# Altium PCB SingleLayer.PcbDoc
Units mm, origin at the board's own origin, x right, y up, seen from the top; angles counter-clockwise.
Board outline 33.78 x 22.48 mm, 2 copper layers (Top Layer, Bottom Layer); 13 components, 11 nets, 45 pads, 12 vias.
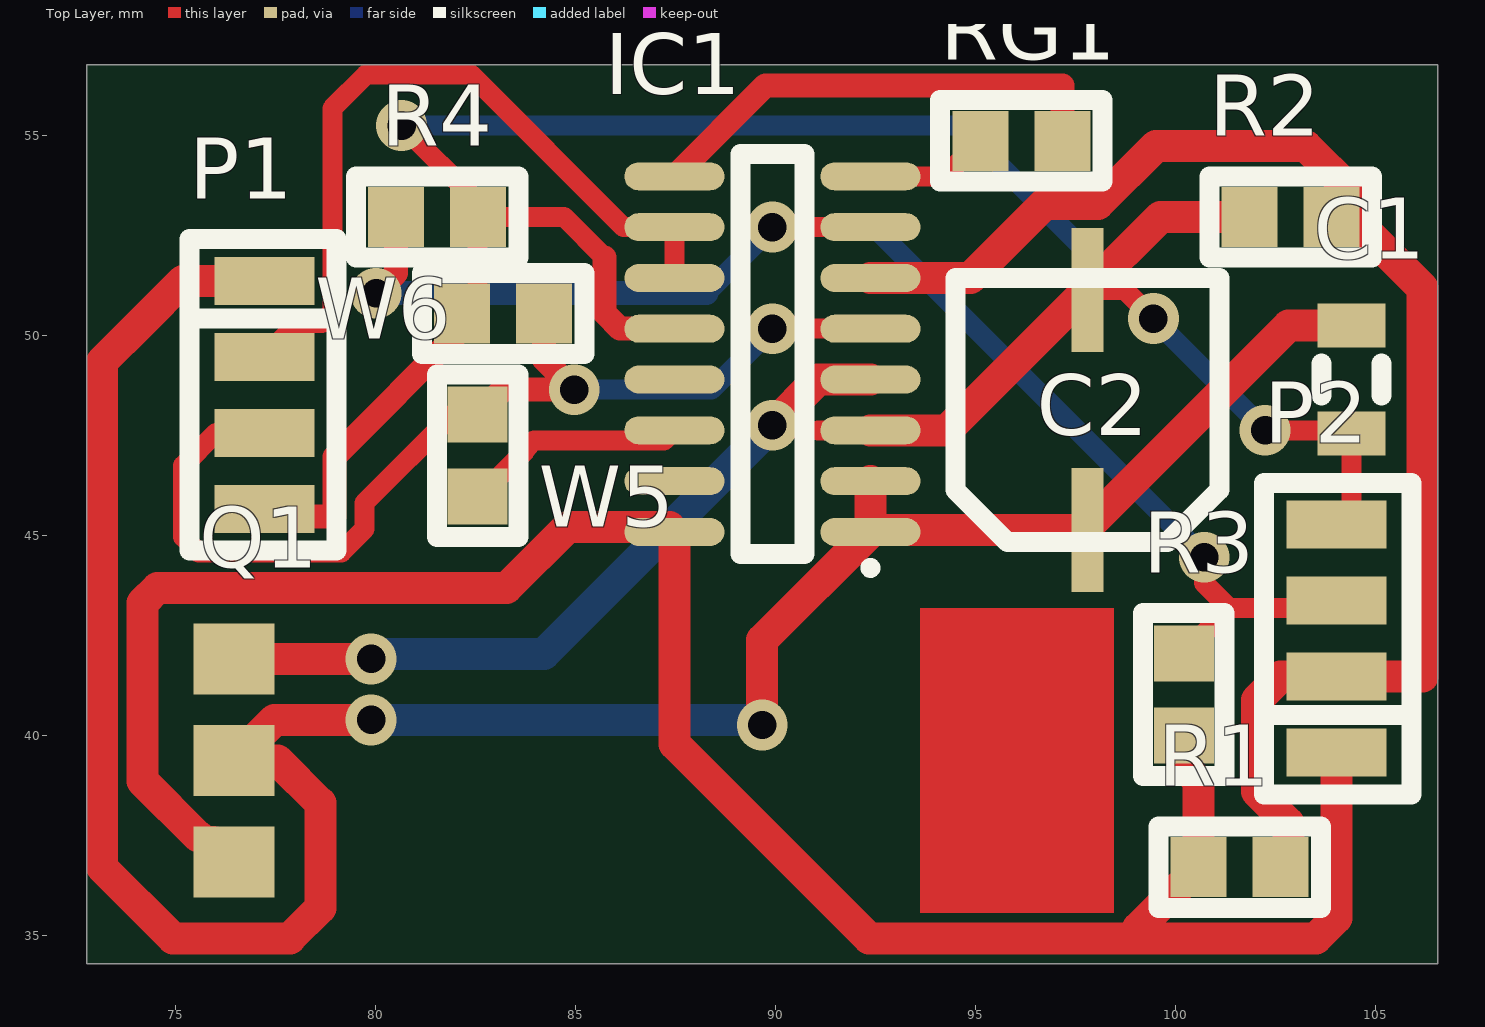
[diagram p0: Top Layer view]
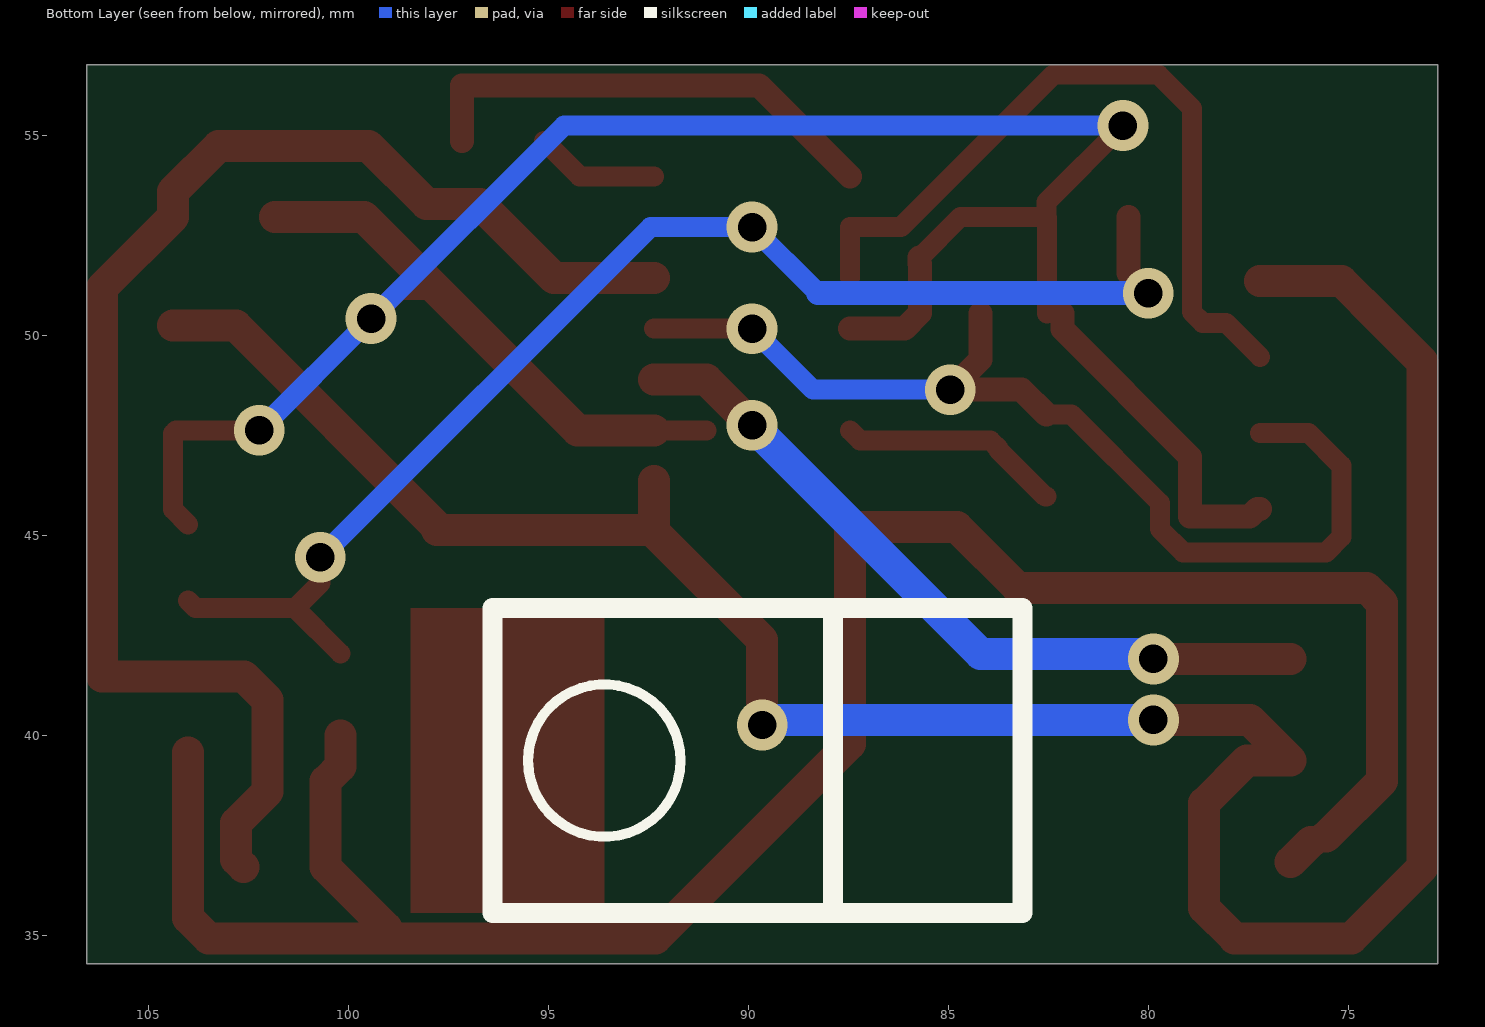
[diagram p1: Bottom Layer view, seen from below]

## Layer stack, top to bottom
Top Solder: solder mask 0.0102, Solder Resist, Dk 3.5
Top Layer: signal copper 0.0356
Dielectric 1: dielectric 0.32, FR-4, Dk 4.8
Bottom Layer: signal copper 0.0356
Bottom Solder: solder mask 0.0102, Solder Resist, Dk 3.5

## Board outline
72.771,34.29 106.553,34.29 106.553,56.769 72.771,56.769

## Design rules (kind name [scope] priority, off if disabled: settings)
Clearance [All] p1: gap=0.2
PolygonConnect [All] p1: connectstyle=Relief reliefconductorwidth=0.254 reliefentries=4 polygonreliefangle="90 Angle" airgapwidth=0.254
RoutingVias [All] p1: holewidth=0.711 width=1.27 viastyle="Through Hole" minholewidth=0.711 minwidth=1.27 maxholewidth=0.711 maxwidth=1.27
SolderMaskExpansion [All] p1: expansion=0.102
Width [All] p1: maxlimit=0.8 minlimit=0.254 preferedwidth=0.6
30 further rules are at their usual default settings.

## Components (designator, comment, footprint, x,y, rotation, side; value= is the part's Value field where it differs from the comment)
C1 "100n" C1206 104.394,48.895 r270 top
C2 "10u" "SMD CAPACITOR 220UF 16V" 97.79,48.133 r180 top
IC1 "INA125U" SOIC16_M 89.916,49.53 r180 top
P1 "Output/Power" "SMD 4Wire" 77.216,48.514 r180 top
P2 "Input/Reference" "SMD 4Wire" 104.013,42.418 r0 top
Q1 "NPN" TO220_SMD_BENT 76.581,36.83 r0 top
R1 "Res1" R0805 101.6,36.703 r180 top
R2 "Res1" R0805 102.87,52.959 r0 top
R3 "Res1" R0805 100.203,41.021 r270 top
R4 "Res1" R0805 81.534,52.959 r180 top
RG1 "Res1" R0805 96.139,54.864 r180 top
W5 "VOUT-" R0805 82.55,46.99 r270 top
W6 "GND" R0805 83.185,50.546 r180 top

## Footprints (in the part's own frame and the unit in brackets; to place one, negate y for a bottom-side part, rotate by r counter-clockwise, add the part's x,y. Pads: shape width x height; smd on the part's side, far side on the other; paste and mask are expansions set on the pad)
C1206 [mm] "Chip Capacitor, Body 3.2x1.6mm, IPC High Density"
  rect 1.1x1.7 smd: 1(-1.35,0) 2(1.35,0)
  silkscreen extent -0.4,-0.75 0.4,0.75, body extent -1.7,-0.9 1.7,0.9, height 1.3
R0805 [mm]
  rect 1.4x1.5 smd: 1(-1.025,0) 2(1.025,0)
  silkscreen extent -2.03,-1.02 2.03,1.02, body extent -1.4,-0.76 1.4,0.76, height 1
"SMD 4Wire" [mm]
  rect 2.5x1.2 smd: 1(0,-2.85) 2(0,-0.95) 3(0,0.95) 4(0,2.85)
  silkscreen extent -1.8,-3.89 1.88,3.89
"SMD CAPACITOR 220UF 16V" [mm]
  rect 0.8x3.1 smd: 1(0,3) 2(0,-3)
  silkscreen extent -3.3,-3.3 3.3,3.3, body extent -3,-3 3,3, height 5
SOIC16_M [mm] "SOIC, 16-Leads, Body 9.9x3.9mm, Pitch 1.27mm, IPC Low Density"
  oval 2.5x0.7 smd: 1(-2.45,4.445) 2(-2.45,3.175) 3(-2.45,1.905) 4(-2.45,0.635) 5(-2.45,-0.635) 6(-2.45,-1.905) 7(-2.45,-3.175) 8(-2.45,-4.445) 9(2.45,-4.445) 10(2.45,-3.175) 11(2.45,-1.905) 12(2.45,-0.635) 13(2.45,0.635) 14(2.45,1.905) 15(2.45,3.175) 16(2.45,4.445)
  silkscreen extent -2.58,-5 0.8,5.47, body extent -2,-5 2,5, height 1.91
TO220_SMD_BENT [mil]
  rect 80x70 smd: 1(-5,0) 2(-5,100) 3(-5,200)
  Top Layer region: 670.43,-50 861.14,-50 861.14,250 670.43,250
  body extent 259,-50 778,250, height 177

## Part data
C1 C2: library part CAP_1, "Capacitor"
IC1: "<b>Instrumentation Amplifier</b><p> / with Precision Voltage Reference"
P1 P2: library part "Header 4", "Header, 4-Pin"
Q1: "NPN Bipolar Transistor"
R1 R2 R3 R4 RG1: "Resistor"
W5 W6: library part Jumper, "Jumper Wire"

## Via types
v1: diameter 1.27, hole 0.711, Top Layer to Bottom Layer, 12 vias

## Nets (pads, with @x,y where several pads share a name; then routed paths per layer and width w, separated by ;. In a path a pad name is that pad's centre, name@x,y a point inside that pad or via, vN(x,y) a via of type N, cw(c..) or ccw(c..) an arc to the next point about the centre after c; other vN are vias at no path point)
2_5V: IC1.14 W5.2 | length 5.6
  Top Layer w0.5: W5.2 82.586,45.965 83.75,47.129 83.75,47.165 83.956,47.371 87.212,47.371 IC1.14
12V: C1.1 C2.1 IC1.1 IC1.2 P1.1 Q1.2 | length 64.4
  Top Layer w0.8: P1.1 75.184,51.364 74.168,50.348 73.152,49.332 73.152,36.703 74.93,34.925 77.851,34.925 78.613,35.687 78.613,38.303 77.546,39.37 Q1.2 77.47,40.386 v1(79.883,40.386) ; v1(89.662,40.259) 89.662,42.381 IC1.1 ; IC1.2 IC1.1 ; C1.1 102.823,50.245 97.79,45.212 C2.1 92.414,45.133 IC1.1
  Bottom Layer w0.8: v1(79.883,40.386) 89.535,40.386 v1(89.662,40.259)
GND: C1.2 C2.2 IC1.3 IC1.12 P1.4 P2.4 R2.1 R4.1 W6.2 | length 64.9
  Top Layer w0.5: v1(80.645,55.245) 82.559,53.331 R4.1 ; W6.2@82.541,50.546 82.541,52.941 R4.1 ; 85.725,51.943 84.709,52.959 R4.1 ; 91.059,47.625 IC1.3 ; C2.2 98.727,51.133 v1(99.441,50.419) ; v1(102.235,47.625) 104.314,47.625 C1.2 104.394,45.649 P2.4
  Top Layer w0.6: P1.4 77.278,45.664 77.476,45.466 78.966,45.466 78.966,46.962 82.16,50.156 W6.2 ; 85.725,51.943 85.725,51.796 85.716,51.787 85.716,50.555 86.106,50.165 IC1.12
  Top Layer w0.8: IC1.3 94.282,47.625 C2.2 99.616,52.959 R2.1
  Bottom Layer w0.5: v1(80.645,55.245) 94.615,55.245 v1(99.441,50.419) v1(102.235,47.625)
NetIC1_4: IC1.4 Q1.3 | length 18.8
  Top Layer w0.8: Q1.3 v1(79.883,41.91) ; v1(89.916,47.752) 91.059,48.895 IC1.4
  Bottom Layer w0.8: v1(79.883,41.91) 80.01,42.037 84.201,42.037 v1(89.916,47.752)
NetIC1_8: IC1.8 RG1.2 | length 3.1
  Top Layer w0.5: IC1.8 94.225,53.975 RG1.2
NetIC1_9: IC1.9 RG1.1 | length 12
  Top Layer w0.6: IC1.9 89.743,56.252 97.164,56.252 RG1.1
VIN+: IC1.6 P2.2 R1.1 R2.2 | length 35.7
  Top Layer w0.8: IC1.6 94.869,51.435 96.717,53.283 98.05,53.283 99.504,54.737 103.251,54.737 104.394,53.594 104.394,52.959 106.172,51.181 106.172,41.468 P2.2 102.616,41.468 102.032,40.884 102.032,38.592 102.813,37.81 102.813,36.891 R1.1
VIN-: IC1.7 P2.3 R3.1 R4.2 | length 35.3
  Top Layer w0.5: v1(89.916,52.705) IC1.7 ; R3.1 101.337,43.18 ; v1(100.711,44.45) 100.711,43.806 101.337,43.18 ; P2.3 103.825,43.18 101.337,43.18
  Top Layer w0.6: v1(80.01,51.054) 80.509,51.553 R4.2
  Bottom Layer w0.5: 88.265,51.054 v1(89.916,52.705) 92.456,52.705 v1(100.711,44.45)
  Bottom Layer w0.6: v1(80.01,51.054) 88.265,51.054
VOUT+: IC1.10 IC1.11 P1.2 | length 19
  Top Layer w0.5: P1.2 78.066,50.314 78.652,50.314 78.916,50.578 78.916,55.675 79.756,56.515 82.386,56.515 86.196,52.705 IC1.10 IC1.11
VOUT-: IC1.5 P1.3 W5.1 W6.1 | length 26.4
  Top Layer w0.5: P1.3 76.007,47.564 75.184,46.741 75.184,44.958 75.565,44.577 79.138,44.577 79.716,45.155 79.716,45.807 81.924,48.015 W5.1 ; v1(89.916,50.165) IC1.5
  Top Layer w0.6: W5.1 83.176,48.641 v1(84.963,48.641) 84.21,49.394 W6.1
  Bottom Layer w0.5: v1(84.963,48.641) 88.392,48.641 v1(89.916,50.165)
VREF: IC1.16 P2.1 Q1.1 R1.2 R3.2 | length 54.9
  Top Layer w0.8: Q1.1@75.565,37.465 74.168,38.862 74.168,43.307 74.549,43.688 83.274,43.688 84.798,45.212 IC1.16@87.339,45.212 ; Q1.1@75.946,37.338 Q1.1 ; IC1.16 87.466,39.788 92.329,34.925 103.505,34.925 104.013,35.433 P2.1 ; 99.051,35.179 R1.2 100.575,38.853 100.203,39.225 R3.2
pads on no net: IC1.13 IC1.15